# EAGLE board Brians test board 2 (EAGLE 6.5.0)
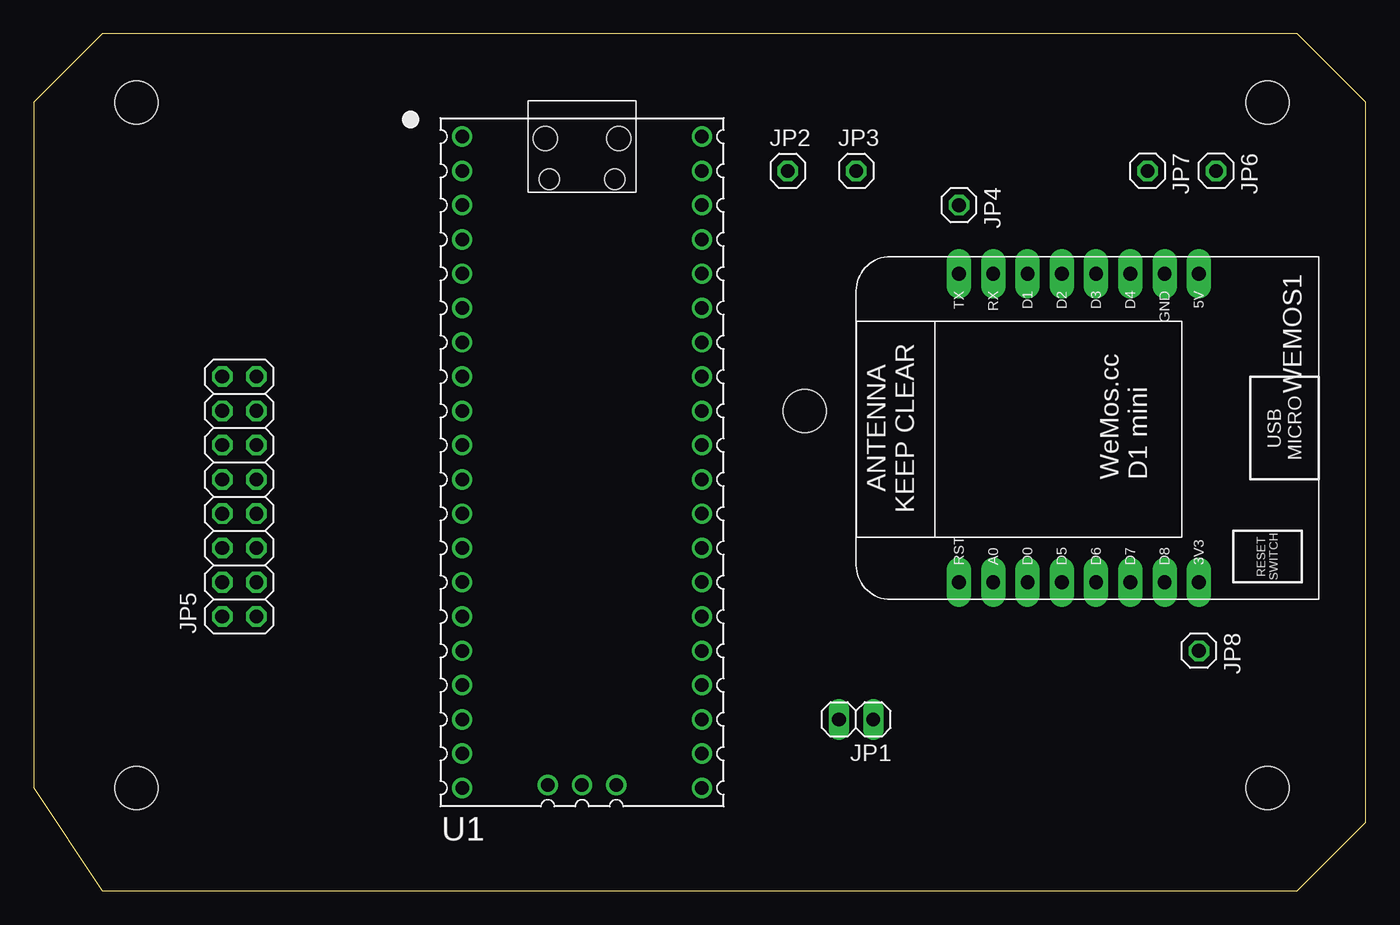
[diagram p0: board, top side]
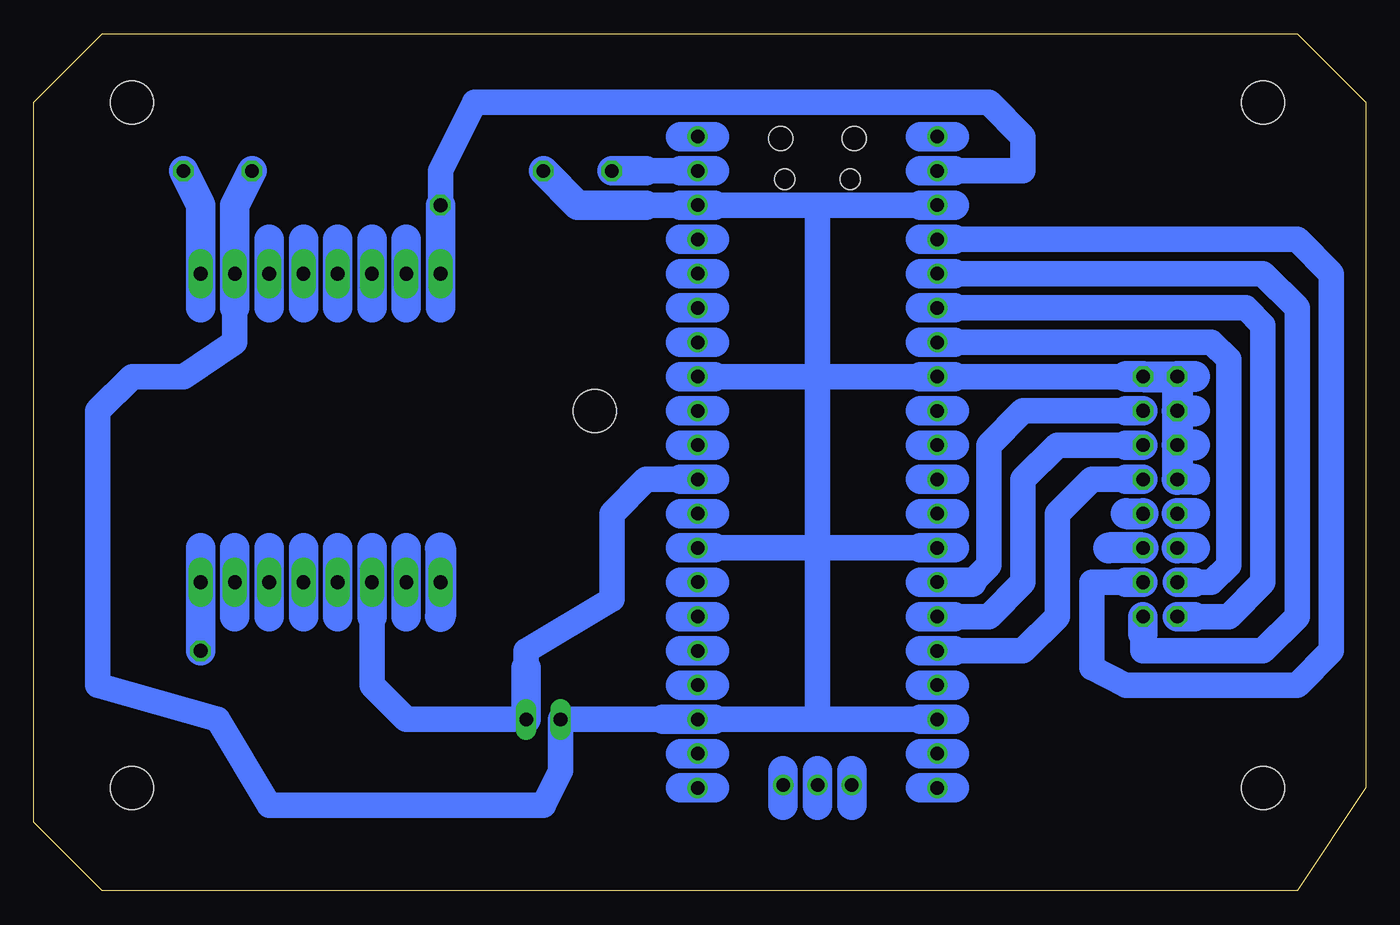
[diagram p1: board, bottom side, seen from below]

Size 98.73 x 63.5 mm. Coordinates in mm from the lower left corner, seen from the top.
Outline: 0,7.62 5.08,0 93.65,0 98.73,5.08 98.73,58.41 93.64,63.5 5.09,63.5 0,58.41 0,7.62
Copper layers (1*16): Top 0.035mm / dielectric 1.5mm / Bottom 0.035mm
Design rules "default": minimum track width 10mil, minimum drill 24mil, track to track 8mil, track to pad 8mil, pad to pad 8mil, via to via 8mil, smd to smd 8mil, copper to edge 40mil, drill to drill 8mil, minimum pad ring 10mil, minimum via ring 8mil, stop-mask expansion 4mil, vias tented up to drill 0mil, thermal gap 10mil
Holes 3.2 mm at 7.62,58.42 91.44,58.42 91.44,7.62 7.62,7.62 57.15,35.56

## Footprints (pad centres in the part's own frame; a part is rotated, then mirrored left to right if it is on the bottom)
1X02 = drill 1.016 long: 1 -1.27,0; 2 1.27,0
1X01 = drill 1.016 octagon: 1 0,0
2X08 = drill 1.016 octagon: 1 -8.89,-1.27; 2 -8.89,1.27; 3 -6.35,-1.27; 4 -6.35,1.27; 5 -3.81,-1.27; 6 -3.81,1.27; 7 -1.27,-1.27; 8 -1.27,1.27; 9 1.27,-1.27; 10 1.27,1.27; 11 3.81,-1.27; 12 3.81,1.27; 13 6.35,-1.27; 14 6.35,1.27; 15 8.89,-1.27; 16 8.89,1.27
PICO-PKG-TH = drill 1: 1 -8.89,24.13; 2 -8.89,21.59; 3 -8.89,19.05; 4 -8.89,16.51; 5 -8.89,13.97; 6 -8.89,11.43; 7 -8.89,8.89; 8 -8.89,6.35; 9 -8.89,3.81; 10 -8.89,1.27; 11 -8.89,-1.27; 12 -8.89,-3.81; 13 -8.89,-6.35; 14 -8.89,-8.89; 15 -8.89,-11.43; 16 -8.89,-13.97; 17 -8.89,-16.51; 18 -8.89,-19.05; 19 -8.89,-21.59; 20 -8.89,-24.13; 21 8.89,-24.13; 22 8.89,-21.59; 23 8.89,-19.05; 24 8.89,-16.51; 25 8.89,-13.97; 26 8.89,-11.43; 27 8.89,-8.89; 28 8.89,-6.35; 29 8.89,-3.81; 30 8.89,-1.27; 31 8.89,1.27; 32 8.89,3.81; 33 8.89,6.35; 34 8.89,8.89; 35 8.89,11.43; 36 8.89,13.97; 37 8.89,16.51; 38 8.89,19.05; 39 8.89,21.59; 40 8.89,24.13; 41 -2.54,-23.9; 42 0,-23.9; 43 2.54,-23.9 | hole 1.8: -2.725,24; 2.725,24 | hole 1.5: -2.425,20.97; 2.425,20.97
WEMOS-D1-MINI = drill 1.016 pad 1.829 long: 3V3 -10.16,-10.16; 5V 12.7,-10.16; A0 -10.16,5.08; D0 -10.16,2.54; D1 12.7,2.54; D2 12.7,0; D3 12.7,-2.54; D4 12.7,-5.08; D5 -10.16,0; D6 -10.16,-2.54; D7 -10.16,-5.08; D8 -10.16,-7.62; GND 12.7,-7.62; RESET -10.16,7.62; RX 12.7,5.08; TX 12.7,7.62

## Placement (x,y rotation side)
JP1  [1X02]  60.96,12.7 180 top
JP2  [1X01]  55.88,53.34 0 top
JP3  [1X01]  60.96,53.34 0 top
JP4  [1X01]  68.58,50.8 270 top
JP5  [2X08]  15.24,29.21 90 top
JP6  [1X01]  87.63,53.34 270 top
JP7  [1X01]  82.55,53.34 270 top
JP8  [1X01]  86.36,17.78 270 top
U1  RASPBERRY_PICOTH  [PICO-PKG-TH]  40.64,31.75 0 top
WEMOS1  [WEMOS-D1-MINI]  76.2,33.02 90 top

## Library data of the parts
JP1-JP8 = pinhead
U1 = RpiPico
WEMOS1 = esp8266modules

## Nets
3V3(OUT): U1.36
GND: JP3.1 JP5.10 JP5.12 JP5.14 JP5.15 JP5.16 U1.3 U1.8 U1.13 U1.18 U1.23 U1.28 U1.33 U1.38
N$1: JP1.2 JP7.1 WEMOS1.GND
N$2: JP6.1 WEMOS1.5V
N$3: JP5.1 U1.5
N$4: JP8.1 WEMOS1.3V3
N$5: JP2.1 U1.39
N$6: JP1.1 U1.30 WEMOS1.D0
N$7: JP4.1 U1.2 WEMOS1.TX
N$8: JP5.3 U1.4
N$10: JP5.13 U1.14
N$11: JP5.11 U1.15
N$12: JP5.9 U1.16
N$13: JP5.2 U1.6
N$14: JP5.4 U1.7
N$50: JP5.5
N$54: JP5.8
N$55: JP5.6
N$57: JP5.7
SWGND: U1.42
VBUS: U1.40

## Tracks (layer width: path | path; a pad name or v marks a point on that pad's centre or on a via)
GND
  Bottom 0.254: U1.23 48.26,12.7
  Bottom 1.905: 59.69,12.7 52.07,12.7 | 53.34,50.8 50.8,50.8 U1.38 48.26,50.8 40.64,50.8 | 48.26,12.7 40.64,12.7 | 40.64,12.7 33.02,12.7 U1.18 | U1.28 48.26,25.4 40.64,25.4 | 40.64,25.4 33.02,25.4 U1.13 | 40.64,25.4 40.64,12.7 | 40.64,50.8 33.02,50.8 U1.3 | 40.64,38.1 33.02,38.1 U1.8 30.48,38.1 17.78,38.1 | 40.64,38.1 48.26,38.1 U1.33 | 40.64,38.1 40.64,25.4 | 40.64,50.8 40.64,38.1
  Bottom 2.184: 30.48,38.1 33.02,38.1 | 30.48,25.4 33.02,25.4 | 30.48,12.7 33.02,12.7 | 48.26,12.7 52.07,12.7 | 48.26,25.4 50.8,25.4 | 48.26,38.1 50.8,38.1 | 48.26,50.8 50.8,50.8 | 53.34,50.8 58.42,50.8 JP3.1 | 30.48,50.8 33.02,50.8
  Bottom 2.286: 12.7,30.48 JP5.10 JP5.12 | 12.7,33.02 JP5.12 | JP5.14 12.7,35.56 | 12.7,38.1 JP5.16 | 17.78,38.1 JP5.15 JP5.16 | JP5.16 JP5.14 | JP5.14 JP5.12
N$1
  Bottom 1.905: JP1.2 59.69,8.89 60.96,6.35 81.28,6.35 85.09,12.7 93.98,15.24 93.98,35.56 91.44,38.1 87.63,38.1 83.82,40.64 83.82,43.18
  Bottom 2.184: JP7.1 83.82,50.8 WEMOS1.GND 83.82,43.18
N$2
  Bottom 1.905: WEMOS1.5V 86.36,50.8
  Bottom 2.184: JP6.1 86.36,50.8 86.36,43.18
N$3
  Bottom 1.905: 16.51,19.05 16.51,17.78 7.62,17.78 5.08,20.32 5.08,43.18 7.62,45.72 30.48,45.72 U1.5
  Bottom 2.184: 33.02,45.72 30.48,45.72 | JP5.1 16.51,19.05
N$4
  Bottom 1.905: WEMOS1.3V3 JP8.1
  Bottom 2.184: 86.36,25.4 JP8.1
N$5
  Bottom 1.905: 53.34,53.34 50.8,53.34 U1.39
  Bottom 2.184: 48.26,53.34 50.8,53.34 | 53.34,53.34 JP2.1
N$6
  Bottom 1.905: WEMOS1.D0 73.66,20.32 73.66,15.24 71.12,12.7 JP1.1 | 62.23,16.51 62.23,17.78 55.88,21.59 55.88,27.94 53.34,30.48 50.8,30.48 U1.30
  Bottom 2.184: 48.26,30.48 50.8,30.48 | 73.66,25.4 73.66,20.32 | JP1.1 62.23,16.51
N$7
  Bottom 1.905: 68.58,48.26 WEMOS1.TX | U1.2 30.48,53.34 25.4,53.34 25.4,55.88 27.94,58.42 66.04,58.42 68.58,53.34 JP4.1
  Bottom 2.184: 68.58,43.18 68.58,48.26 JP4.1 | 33.02,53.34 30.48,53.34
N$8
  Bottom 1.905: 17.78,22.86 20.32,22.86 20.32,16.51 17.78,15.24 5.08,15.24 2.54,17.78 2.54,45.72 5.08,48.26 30.48,48.26 U1.4
  Bottom 2.184: 30.48,48.26 33.02,48.26 | 17.78,22.86 JP5.3
N$9
  Bottom 2.286: 68.58,25.4 68.58,20.32
N$10
  Bottom 1.905: U1.14 29.21,22.86 27.94,24.13 27.94,33.02 25.4,35.56 17.78,35.56
  Bottom 2.184: 29.21,22.86 33.02,22.86 | 17.78,35.56 JP5.13
N$11
  Bottom 1.905: U1.15 30.48,20.32 27.94,20.32 25.4,22.86 25.4,30.48 22.86,33.02 17.78,33.02
  Bottom 2.184: 30.48,20.32 33.02,20.32 | 17.78,33.02 JP5.11
N$12
  Bottom 1.905: U1.16 30.48,17.78 25.4,17.78 22.86,20.32 22.86,27.94 20.32,30.48 17.78,30.48
  Bottom 2.184: 30.48,17.78 33.02,17.78 | 17.78,30.48 JP5.9
N$13
  Bottom 1.905: 12.7,20.32 10.16,20.32 7.62,22.86 7.62,41.91 8.89,43.18 30.48,43.18 U1.6
  Bottom 2.184: 33.02,43.18 30.48,43.18 | JP5.2 12.7,20.32
N$14
  Bottom 1.905: 12.7,22.86 11.43,22.86 10.16,24.13 10.16,39.37 11.43,40.64 30.48,40.64 U1.7
  Bottom 2.184: 30.48,40.64 33.02,40.64 | 12.7,22.86 JP5.4
N$15
  Bottom 2.184: 30.48,35.56 33.02,35.56
N$16
  Bottom 2.184: 30.48,33.02 33.02,33.02
N$17
  Bottom 2.184: 30.48,30.48 33.02,30.48
N$18
  Bottom 2.184: 30.48,27.94 33.02,27.94
N$19
  Bottom 2.184: 30.48,15.24 33.02,15.24
N$20
  Bottom 2.184: 30.48,10.16 33.02,10.16
N$21
  Bottom 2.184: 30.48,7.62 33.02,7.62
N$22
  Bottom 2.184: 38.1,8.89 38.1,6.35
N$23
  Bottom 2.184: 40.64,8.89 40.64,6.35
N$24
  Bottom 2.184: 43.18,8.89 43.18,6.35
N$25
  Bottom 2.184: 48.26,7.62 50.8,7.62
N$26
  Bottom 2.184: 48.26,10.16 50.8,10.16
N$27
  Bottom 2.184: 48.26,15.24 50.8,15.24
N$28
  Bottom 2.184: 48.26,17.78 50.8,17.78
N$29
  Bottom 2.184: 50.8,20.32 48.26,20.32
N$30
  Bottom 2.184: 48.26,22.86 50.8,22.86
N$31
  Bottom 2.184: 48.26,27.94 50.8,27.94
N$32
  Bottom 2.184: 50.8,33.02 48.26,33.02
N$33
  Bottom 2.184: 48.26,35.56 50.8,35.56
N$34
  Bottom 2.184: 48.26,40.64 50.8,40.64
N$35
  Bottom 2.184: 48.26,43.18 50.8,43.18
N$36
  Bottom 2.184: 48.26,45.72 50.8,45.72
N$37
  Bottom 2.184: 48.26,48.26 50.8,48.26
N$38
  Bottom 2.184: 48.26,55.88 50.8,55.88
N$39
  Bottom 2.184: 81.28,48.26 81.28,43.18
N$40
  Bottom 2.184: 78.74,48.26 78.74,43.18
N$41
  Bottom 2.184: 76.2,43.18 76.2,48.26
N$42
  Bottom 2.184: 73.66,43.18 73.66,48.26
N$43
  Bottom 2.184: 71.12,48.26 71.12,43.18
N$44
  Bottom 2.184: 83.82,25.4 83.82,20.32
N$45
  Bottom 2.184: 81.28,25.4 81.28,20.32
N$46
  Bottom 2.184: 78.74,25.4 78.74,20.32
N$47
  Bottom 2.184: 76.2,25.4 76.2,20.32
N$48
  Bottom 2.184: 71.12,25.4 71.12,20.32
N$49
  Bottom 2.184: 33.02,55.88 30.48,55.88
N$50
  Bottom 2.286: JP5.5 19.05,25.4
N$54
  Bottom 2.286: 12.7,27.94 JP5.8
N$55
  Bottom 2.286: 12.7,25.4 JP5.6
N$57
  Bottom 2.286: 17.78,27.94 JP5.7